# Altium PCB Backplane.PcbDoc (part 1 of 3)
Units mil, origin at the board's own origin, x right, y up, seen from the top; angles counter-clockwise.
Board outline 16600 x 5110.24 mil, 4 copper layers (Component Side, Signal Layer 2, Signal Layer 1, Solder Side), stack 33.234 mil thick; 44 components, 199 nets, 1072 pads, 16 vias.
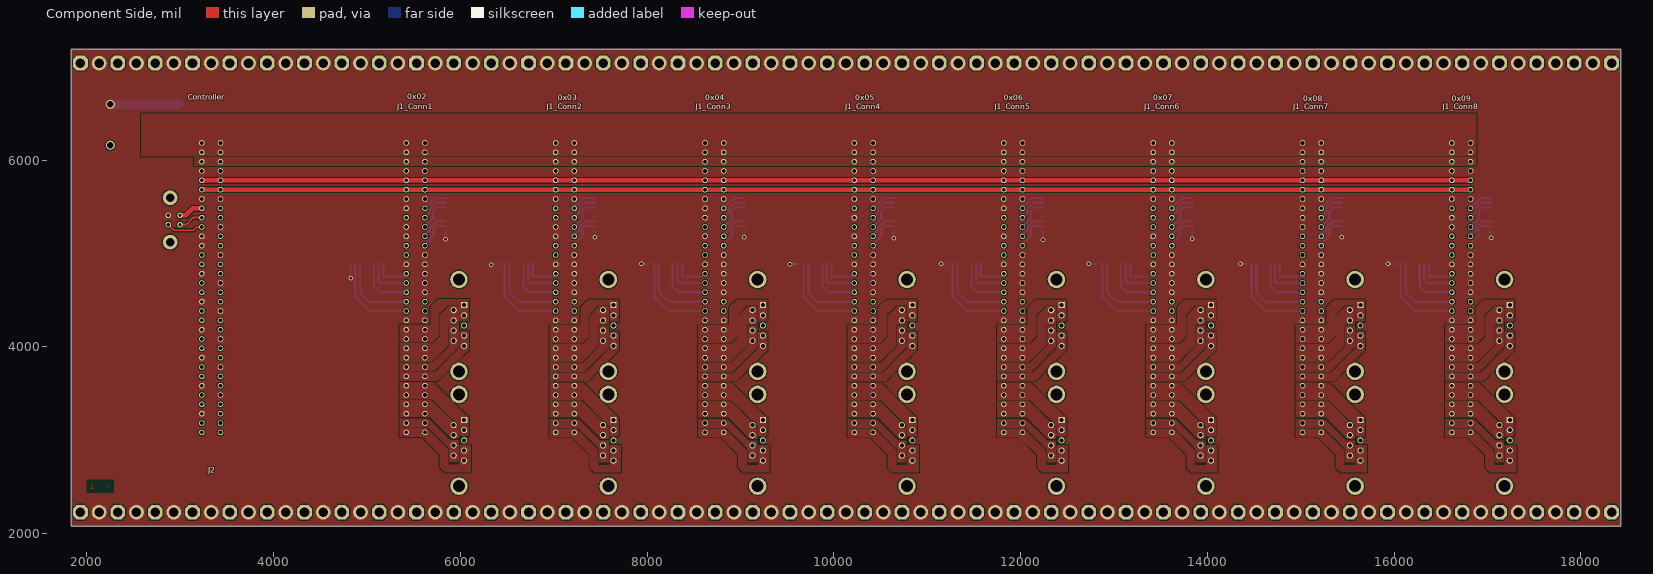
[diagram p0: Component Side view]
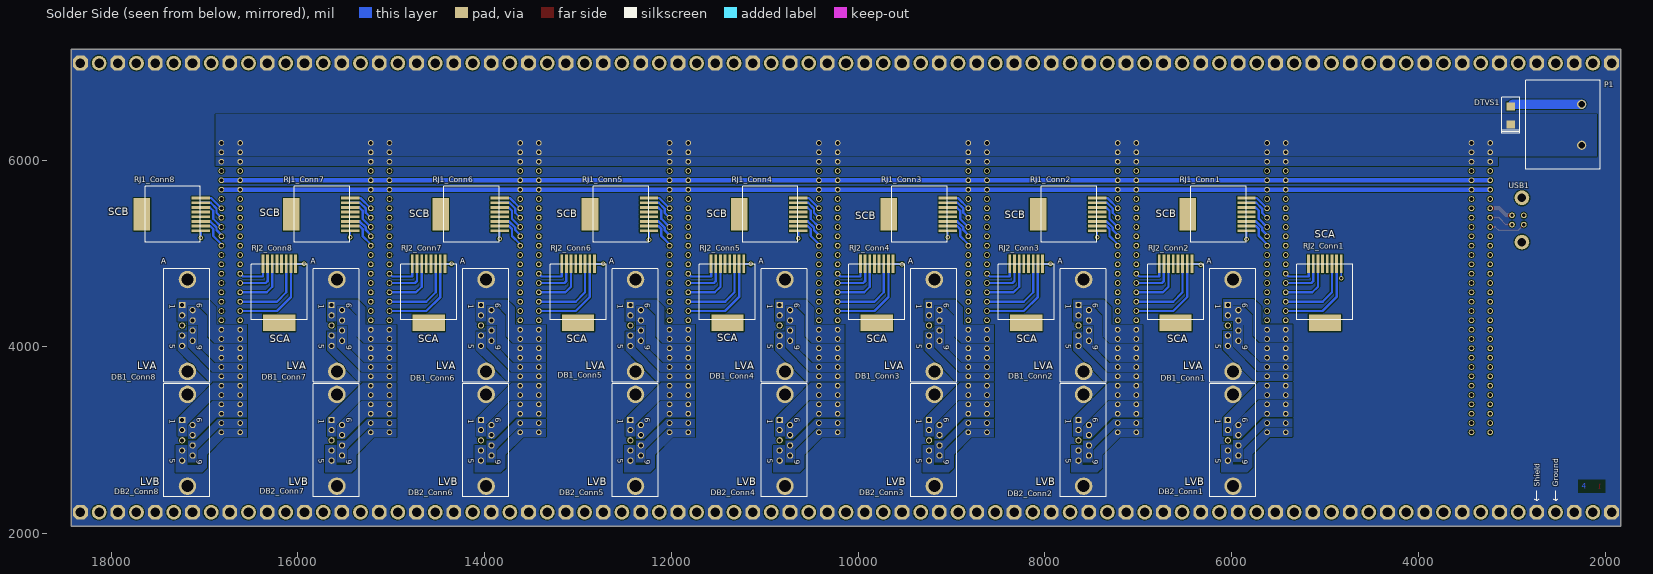
[diagram p1: Solder Side view, seen from below]
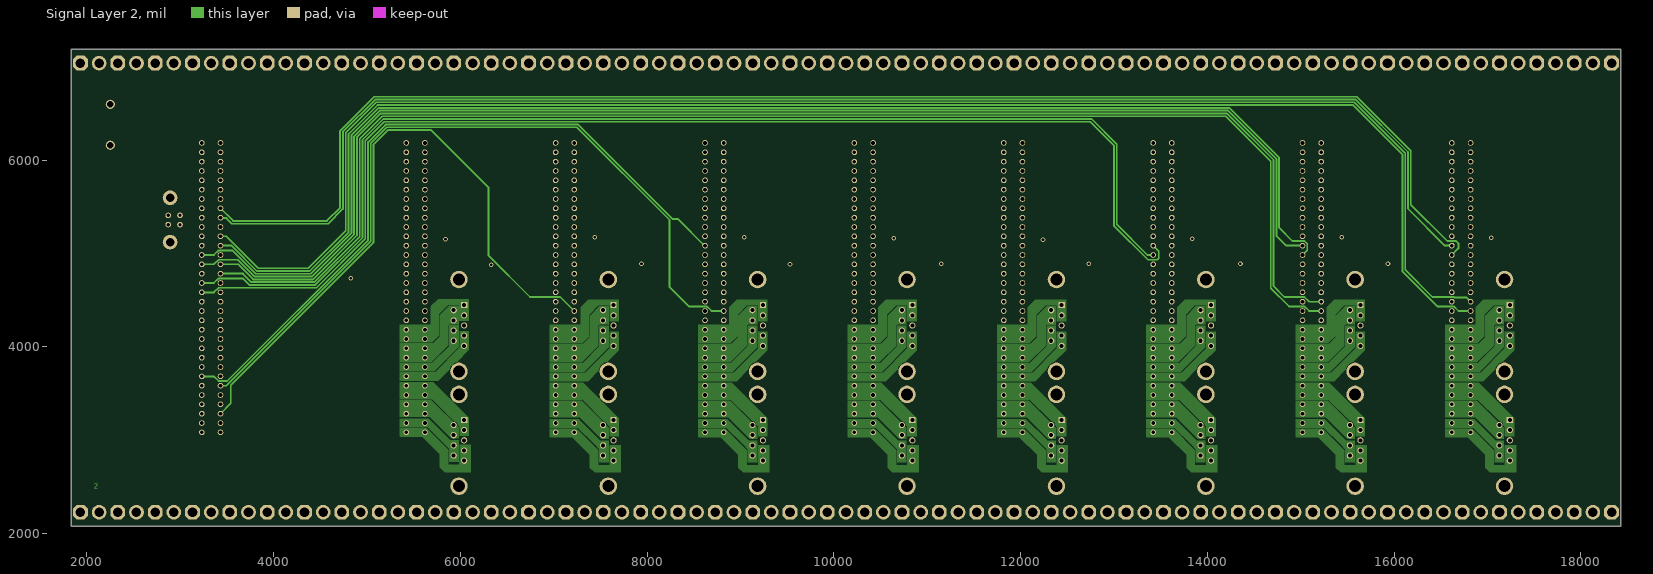
[diagram p2: Signal Layer 2]
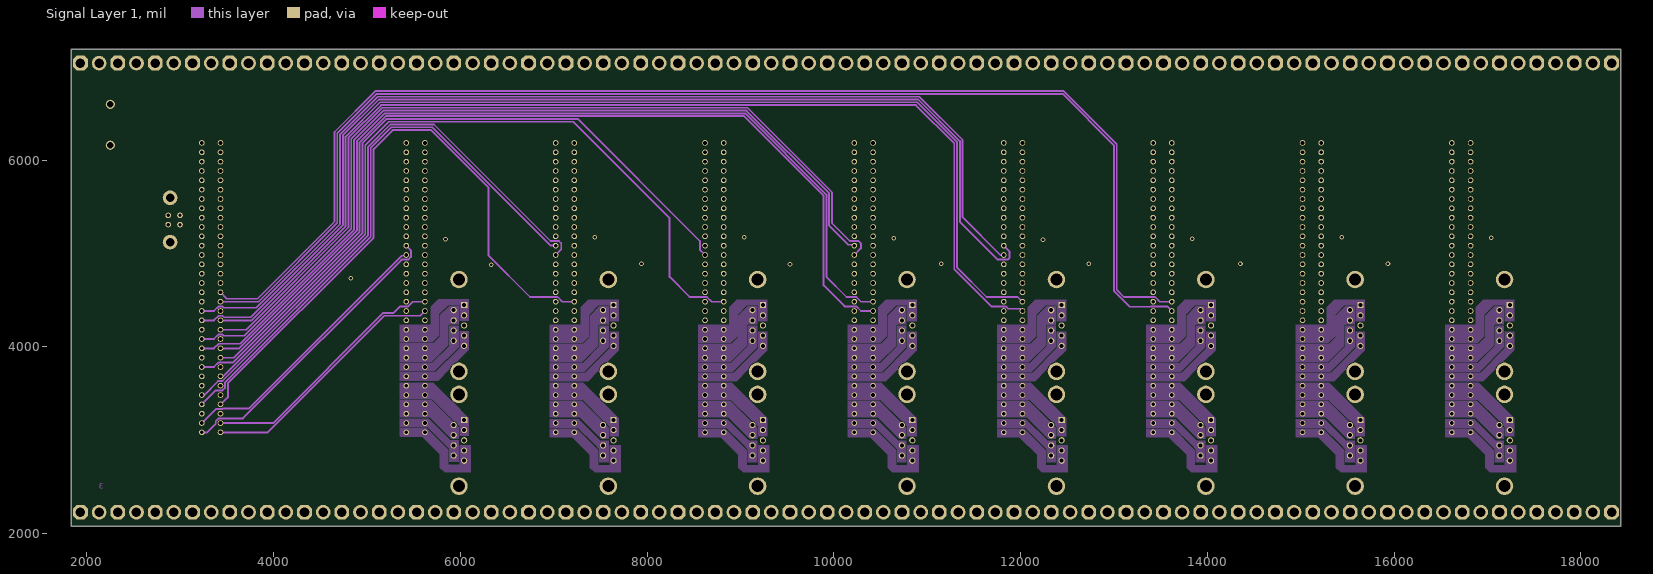
[diagram p3: Signal Layer 1]
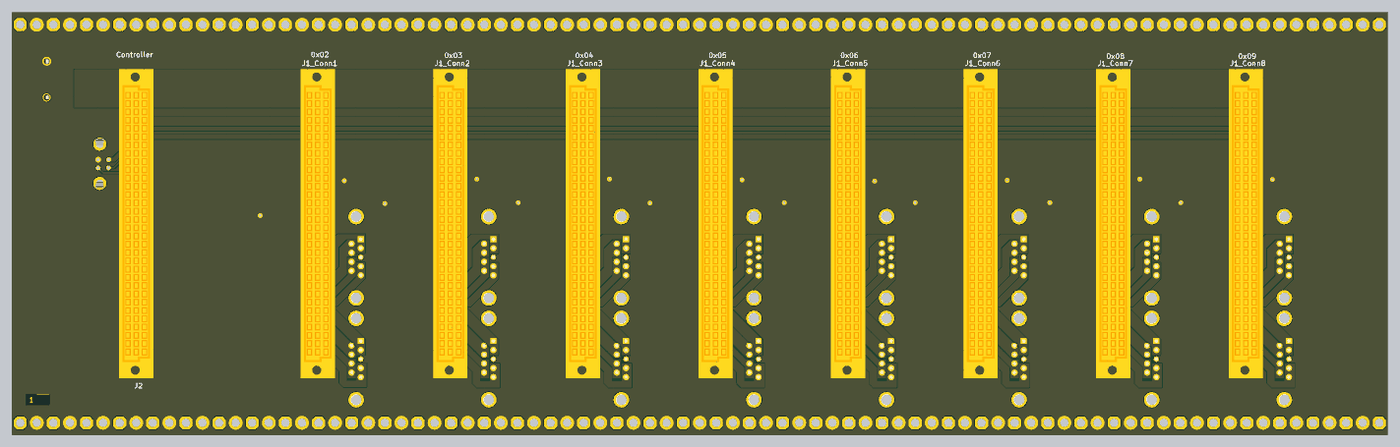
[diagram p6: 3D render of the assembled board from above, using the file's embedded part models]
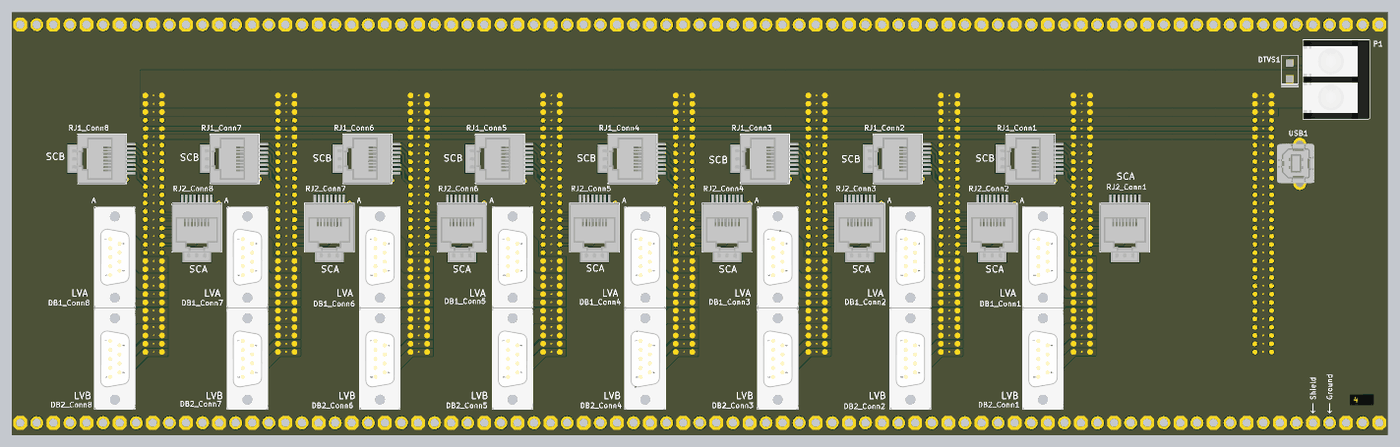
[diagram p7: 3D render of the assembled board from below, using the file's embedded part models]

## Layer stack, top to bottom
Top Solder: solder mask 0.4, Solder Resist, Dk 3.5
Component Side: signal copper 1.4
Dielectric 1: core 12.6, FR-4, Dk 4.8
Signal Layer 2: signal copper 1.4173
Dielectric 3: prepreg 5, Dk 4.2
Signal Layer 1: signal copper 1.4169
Dielectric 4: core 10, Dk 4.2
Solder Side: signal copper 1.4
Bottom Solder: solder mask 0.4, Solder Resist, Dk 3.5

## Board outline
1830,2080 18430,2080 18430,7190.23 1830,7190.24

## Design rules (kind name [scope] priority, off if disabled: settings)
Clearance [All] p1: gap=10.08 ignorepadtopadclearanceinfootprint=FALSE except(0: Arc-Hole Track-Hole SMDPad-Hole THPad-Hole Via-Hole Fill-Hole Poly-Hole Region-Hole Text-Hole)
PolygonConnect [All] p1: connectstyle=Direct reliefconductorwidth=39.37 reliefentries=4 polygonreliefangle="90 Angle" airgapwidth=10.08
RoutingVias [All] p1: holewidth=31.5 width=62.99 viastyle="Through Hole" minholewidth=28 minwidth=50 maxholewidth=28 maxwidth=50
SolderMaskExpansion [All] p1: expansion=4
Width Width_2 [(InNet('NetDB1_1') OR InNet('NetDB1_4') OR InNet('NetDB1_6') OR InNet('NetDB1_8'))] p1: maxlimit=59.06 minlimit=10 preferedwidth=59.06 toplayer_minwidth=59.06 midlayer1_maxwidth=10 midlayer1_prefwidth=10 midlayer2_maxwidth=10 midlayer2_prefwidth=10 bottomlayer_minwidth=59.06 minimp=50.000000 maximp=50.000000 favimp=50.000000
Width [(InNet('+5V') OR InNet('24V'))] p2: maxlimit=98.43 minlimit=11.81 preferedwidth=98.43 midlayer1_maxwidth=11.81 midlayer1_prefwidth=11.81 midlayer2_maxwidth=11.81 midlayer2_prefwidth=11.81 minimp=50.000000 maximp=50.000000 favimp=50.000000
Width Width_1 [All] p3: maxlimit=98.43 minlimit=10 preferedwidth=19 toplayer_prefwidth=10 midlayer1_maxwidth=78.74 midlayer2_maxwidth=78.74 bottomlayer_prefwidth=10 minimp=50.000000 maximp=50.000000 favimp=50.000000
30 further rules are at their usual default settings.

## Classes and differential pairs
component class Conn8: DB1_Conn8 DB2_Conn8 J1_Conn8 RJ1_Conn8 RJ2_Conn8
component class Conn7: DB1_Conn7 DB2_Conn7 J1_Conn7 RJ1_Conn7 RJ2_Conn7
component class Conn6: DB1_Conn6 DB2_Conn6 J1_Conn6 RJ1_Conn6 RJ2_Conn6
component class Conn5: DB1_Conn5 DB2_Conn5 J1_Conn5 RJ1_Conn5 RJ2_Conn5
component class Conn4: DB1_Conn4 DB2_Conn4 J1_Conn4 RJ1_Conn4 RJ2_Conn4
component class Conn3: DB1_Conn3 DB2_Conn3 J1_Conn3 RJ1_Conn3 RJ2_Conn3
component class Conn2: DB1_Conn2 DB2_Conn2 J1_Conn2 RJ1_Conn2 RJ2_Conn2
component class Conn1: DB1_Conn1 DB2_Conn1 J1_Conn1 RJ1_Conn1 RJ2_Conn1
component class Backplane: DTVS1 J1 J2 P1 P3 USB1
channel class Connectors: U_Connectors1 U_Connectors2

## Components (designator, comment, footprint, x,y, rotation, side; value= is the part's Value field where it differs from the comment)
DB1_Conn1 "D Connector 9" DSUB1.STRAIGHT 5610,4230 r270 bottom (schematic designator DB1)
DB1_Conn2 "D Connector 9" DSUB1.STRAIGHT 7210,4230 r270 bottom (schematic designator DB1)
DB1_Conn3 "D Connector 9" DSUB1.STRAIGHT 8810,4230 r270 bottom (schematic designator DB1)
DB1_Conn4 "D Connector 9" DSUB1.STRAIGHT 10410,4230 r270 bottom (schematic designator DB1)
DB1_Conn5 "D Connector 9" DSUB1.STRAIGHT 12010,4230 r270 bottom (schematic designator DB1)
DB1_Conn6 "D Connector 9" DSUB1.STRAIGHT 13610,4230 r270 bottom (schematic designator DB1)
DB1_Conn7 "D Connector 9" DSUB1.STRAIGHT 15210,4230 r270 bottom (schematic designator DB1)
DB1_Conn8 "D Connector 9" DSUB1.STRAIGHT 16810,4230 r270 bottom (schematic designator DB1)
DB2_Conn1 "D Connector 9" DSUB1.STRAIGHT 5610,3000 r270 bottom (schematic designator DB2)
DB2_Conn2 "D Connector 9" DSUB1.STRAIGHT 7210,3000 r270 bottom (schematic designator DB2)
DB2_Conn3 "D Connector 9" DSUB1.STRAIGHT 8810,3000 r270 bottom (schematic designator DB2)
DB2_Conn4 "D Connector 9" DSUB1.STRAIGHT 10410,3000 r270 bottom (schematic designator DB2)
DB2_Conn5 "D Connector 9" DSUB1.STRAIGHT 12010,3000 r270 bottom (schematic designator DB2)
DB2_Conn6 "D Connector 9" DSUB1.STRAIGHT 13610,3000 r270 bottom (schematic designator DB2)
DB2_Conn7 "D Connector 9" DSUB1.STRAIGHT 15210,3000 r270 bottom (schematic designator DB2)
DB2_Conn8 "D Connector 9" DSUB1.STRAIGHT 16810,3000 r270 bottom (schematic designator DB2)
DTVS1 "SMBJ36A" SMBJ 3010,6480 r90 bottom
J1_Conn1 "DIN41612_64WAY" "09 03 164 6919" 5520,4785 r270 top (schematic designator J1)
J1_Conn2 "DIN41612_64WAY" "09 03 164 6919" 7120,4785 r270 top (schematic designator J1)
J1_Conn3 "DIN41612_64WAY" "09 03 164 6919" 8720,4785 r270 top (schematic designator J1)
J1_Conn4 "DIN41612_64WAY" "09 03 164 6919" 10320,4785 r270 top (schematic designator J1)
J1_Conn5 "DIN41612_64WAY" "09 03 164 6919" 11920,4785 r270 top (schematic designator J1)
J1_Conn6 "DIN41612_64WAY" "09 03 164 6919" 13520,4785 r270 top (schematic designator J1)
J1_Conn7 "DIN41612_64WAY" "09 03 164 6919" 15120,4785 r270 top (schematic designator J1)
J1_Conn8 "DIN41612_64WAY" "09 03 164 6919" 16720,4785 r270 top (schematic designator J1)
J2 "DIN41612_64WAY" "09 03 164 6919" 3330,4785 r270 top
P1 "Header 2" 8PCV 2250,6380 r270 bottom
RJ1_Conn1 "85513-5013" RJ45_SMD_VERT 5840,5420 r90 bottom (schematic designator RJ1)
RJ1_Conn2 "85513-5013" RJ45_SMD_VERT 7440,5420 r90 bottom (schematic designator RJ1)
RJ1_Conn3 "85513-5013" RJ45_SMD_VERT 9040,5420 r90 bottom (schematic designator RJ1)
RJ1_Conn4 "85513-5013" RJ45_SMD_VERT 10640,5420 r90 bottom (schematic designator RJ1)
RJ1_Conn5 "85513-5013" RJ45_SMD_VERT 12240,5420 r90 bottom (schematic designator RJ1)
RJ1_Conn6 "85513-5013" RJ45_SMD_VERT 13840,5420 r90 bottom (schematic designator RJ1)
RJ1_Conn7 "85513-5013" RJ45_SMD_VERT 15440,5420 r90 bottom (schematic designator RJ1)
RJ1_Conn8 "85513-5013" RJ45_SMD_VERT 17040,5420 r90 bottom (schematic designator RJ1)
RJ2_Conn1 "85513-5013" RJ45_SMD_VERT 5000,4890 r0 bottom (schematic designator RJ2)
RJ2_Conn2 "85513-5013" RJ45_SMD_VERT 6600,4890 r0 bottom (schematic designator RJ2)
RJ2_Conn3 "85513-5013" RJ45_SMD_VERT 8200,4890 r0 bottom (schematic designator RJ2)
RJ2_Conn4 "85513-5013" RJ45_SMD_VERT 9800,4890 r0 bottom (schematic designator RJ2)
RJ2_Conn5 "85513-5013" RJ45_SMD_VERT 11400,4890 r0 bottom (schematic designator RJ2)
RJ2_Conn6 "85513-5013" RJ45_SMD_VERT 13000,4890 r0 bottom (schematic designator RJ2)
RJ2_Conn7 "85513-5013" RJ45_SMD_VERT 14600,4890 r0 bottom (schematic designator RJ2)
RJ2_Conn8 "85513-5013" RJ45_SMD_VERT 16200,4890 r0 bottom (schematic designator RJ2)
USB1 "USB_B" USB_B_VERTICAL 2870,5360 r90 bottom

## Footprints (in the part's own frame and the unit in brackets; to place one, negate y for a bottom-side part, rotate by r counter-clockwise, add the part's x,y. Pads: shape width x height; smd on the part's side, far side on the other; paste and mask are expansions set on the pad)
8PCV [mil]
  round 98.43 hole 73: 1(-219,0) 2(219,0)
  silkscreen extent -479,-600 479,200, body extent -472,-601 476,199, height 770
"09 03 164 6919" [mil]
  round 60 hole 39.37: 0(-1400,100) 1(-1300,100) 2(-1200,100) 3(-1100,100) 4(-1000,100) 5(-900,100) 6(-800,100) 7(-700,100) 8(-600,100) 9(-500,100) 10(-400,100) 11(-300,100) 12(-200,100) 13(-100,100) 14(0,100) 15(100,100) 16(200,100) 17(300,100) 18(400,100) 19(500,100) 20(600,100) 21(700,100) 22(800,100) 23(900,100) 24(1000,100) 25(1100,100) 26(1200,100) 27(1300,100) 28(1400,100) 29(1500,100) 30(1600,100) 31(1700,100) 32(-1400,-100) 33(-1300,-100) 34(-1200,-100) 35(-1100,-100) 36(-1000,-100) 37(-900,-100) 38(-800,-100) 39(-700,-100) 40(-600,-100) 41(-500,-100) 42(-400,-100) 43(-300,-100) 44(-200,-100) 45(-100,-100) 46(0,-100) 47(100,-100) 48(200,-100) 49(300,-100) 50(400,-100) 51(500,-100) 52(600,-100) 53(700,-100) 54(800,-100) 55(900,-100) 56(1000,-100) 57(1100,-100) 58(1200,-100) 59(1300,-100) 60(1400,-100) 61(1500,-100) 62(1600,-100) 63(1700,-100)
  body extent -1720,-207 2017,207, height 477
DSUB1.STRAIGHT [mm]
  round 4.76 hole 3.26: 0(-12.495,-9.5) 0(12.495,-9.5)
  rect 1.69x1.69 hole 1.09: 1(-5.54,-10.92)
  round 1.69 hole 1.09: 2(-2.77,-10.92) 3(0,-10.92) 4(2.77,-10.92) 5(5.54,-10.92) 6(-4.155,-8.08) 7(-1.385,-8.08) 8(1.385,-8.08) 9(4.155,-8.08)
  silkscreen extent -15.44,-15.9 15.42,-3.38, body extent -15.44,-15.9 15.37,-3.3, height 12.7
RJ45_SMD_VERT [mm]
  rect 8.8x4.5 smd: 0(0,16.05)
  rect 0.76x5 smd: 1(4.445,0) 2(3.175,0) 3(1.905,0) 4(0.635,0) 5(-0.635,0) 6(-1.905,0) 7(-3.175,0) 8(-4.445,0)
  silkscreen extent -7.62,0.12 7.62,15.2, body extent -7.62,-1.74 7.62,17.74, height 12.85
SMBJ [mm]
  rect 2.16x2.26 smd: 1(-2.45,0) 2(2.45,0)
  silkscreen extent -4.9,-2.5 4.9,2.5, body extent -3.2,-2 3.3,2, height 2
USB_B_VERTICAL [mm]
  round 4 hole 2.3: 0(-6.02,0.505) 0(6.02,0.505)
  round 1.524 hole 0.92: 1(1.25,3.21) 2(-1.25,3.21) 3(-1.25,0) 4(1.25,0)
  body extent -7.47,-4.06 7.67,7.4, height 15.94

## Part data
DB1_Conn1 DB1_Conn2 DB1_Conn3 DB1_Conn4 DB1_Conn5 DB1_Conn6 DB1_Conn7 DB1_Conn8 DB2_Conn1 DB2_Conn2 DB2_Conn3 DB2_Conn4 DB2_Conn5 DB2_Conn6 DB2_Conn7 DB2_Conn8: "Receptacle Assembly, 9 Position, Right Angle", PackageDocument=O, PartNo=L177TSEH09SOL2RM8, DatasheetDocument=1-Sep-1999, Gender=Receptacle, LatestRevisionDate=17-Jul-2002, LatestRevisionNote="Re-released for DXP Platform.", Orientation="Right Angle", PackageReference=788750, Positions=9, Published=15-Jun-2001, Publisher="Altium Limited"
DTVS1: library part SMBJ, "TVS", ComponentLink1Description="Manufacturer Link", ComponentLink1URL=http://www.infineon.com/, ComponentLink2Description=Datasheet, ComponentLink2URL=http://www.infineon.com/upload/Document/cmc_upload/documents/080/656/bas116series.pdf, DatasheetVersion=Oct-1999, LatestRevisionDate=29-May-2009, LatestRevisionNote="IPC-7351 Footprint Added.", Note="Pin 2 is not connected and not drawn.", PackageDescription="3-Pin SOT-23 Package 0.95 mm Pitch, 2.5 mm Lead Span", PackageReference=SOT-23, PackageVersion=Sep-2001, PartNo=SMBJ36A, Published=21-Mar-2003, Publisher="Altium Limited"
P1: "Header, 2-Pin", PartNo=8PCV-02-006, LatestRevisionDate=17-Jul-2002, LatestRevisionNote="Re-released for DXP Platform.", Publisher="Altium Limited"
RJ1_Conn1 RJ1_Conn2 RJ1_Conn3 RJ1_Conn4 RJ1_Conn5 RJ1_Conn6 RJ1_Conn7 RJ1_Conn8 RJ2_Conn1 RJ2_Conn2 RJ2_Conn3 RJ2_Conn4 RJ2_Conn5 RJ2_Conn6 RJ2_Conn7 RJ2_Conn8: PACKAGE="RJ45, JACK, 8P8C", MPN=85513-5013, PartNo=85513-5013, SUPPLIER=MOLEX

## Free pads (board coordinates)
  oct 157.48x157.48 hole 102.36: 0(1930,2229) 0(1930,7041) 0(2330,2229) 0(2330,7041) 0(2730,2229) 0(2730,7041) 0(3130,2229) 0(3130,7041) 0(3530,2229) 0(3530,7041) 0(3930,2229) 0(3930,7041) 0(4330,2229) 0(4330,7041) 0(4730,2229) 0(4730,7041) 0(5130,2229) 0(5130,7041) 0(5530,2229) 0(5530,7041) 0(5930,2229) 0(5930,7041) 0(6330,2229) 0(6330,7041) 0(6730,2229) 0(6730,7041) 0(7130,2229) 0(7130,7041) 0(7530,2229) 0(7530,7041) 0(7930,2229) 0(7930,7041) 0(8330,2229) 0(8330,7041) 0(8730,2229) 0(8730,7041) 0(9130,2229) 0(9130,7041) 0(9530,2229) 0(9530,7041) 0(9930,2229) 0(9930,7041) 0(10330,2229) 0(10330,7041) 0(10730,2229) 0(10730,7041) 0(11130,2229) 0(11130,7041) 0(11530,2229) 0(11530,7041) 0(11930,2229) 0(11930,7041) 0(12330,2229) 0(12330,7041) 0(12730,2229) 0(12730,7041) 0(13130,2229) 0(13130,7041) 0(13530,2229) 0(13530,7041) 0(13930,2229) 0(13930,7041) 0(14330,2229) 0(14330,7041) 0(14730,2229) 0(14730,7041) 0(15130,2229) 0(15130,7041) 0(15530,2229) 0(15530,7041) 0(15930,2229) 0(15930,7041) 0(16330,2229) 0(16330,7041) 0(16730,2229) 0(16730,7041) 0(17130,2229) 0(17130,7041) 0(17530,2229) 0(17530,7041) 0(17930,2229) 0(17930,7041) 0(18330,2229) 0(18330,7041)
  round 157.48 hole 102.36: 0(2130,2230) 0(2130,7040) 0(2530,2230) 0(2530,7040) 0(2930,2230) 0(2930,7040) 0(3330,2230) 0(3330,7040) 0(3730,2230) 0(3730,7040) 0(4130,2230) 0(4130,7040) 0(4530,2230) 0(4530,7040) 0(4930,2230) 0(4930,7040) 0(5330,2230) 0(5330,7040) 0(5730,2230) 0(5730,7040) 0(6130,2230) 0(6130,7040) 0(6530,2230) 0(6530,7040) 0(6930,2230) 0(6930,7040) 0(7330,2230) 0(7330,7040) 0(7730,2230) 0(7730,7040) 0(8130,2230) 0(8130,7040) 0(8530,2230) 0(8530,7040) 0(8930,2230) 0(8930,7040) 0(9330,2230) 0(9330,7040) 0(9730,2230) 0(9730,7040) 0(10130,2230) 0(10130,7040) 0(10530,2230) 0(10530,7040) 0(10930,2230) 0(10930,7040) 0(11330,2230) 0(11330,7040) 0(11730,2230) 0(11730,7040) 0(12130,2230) 0(12130,7040) 0(12530,2230) 0(12530,7040) 0(12930,2230) 0(12930,7040) 0(13330,2230) 0(13330,7040) 0(13730,2230) 0(13730,7040) 0(14130,2230) 0(14130,7040) 0(14530,2230) 0(14530,7040) 0(14930,2230) 0(14930,7040) 0(15330,2230) 0(15330,7040) 0(15730,2230) 0(15730,7040) 0(16130,2230) 0(16130,7040) 0(16530,2230) 0(16530,7040) 0(16930,2230) 0(16930,7040) 0(17330,2230) 0(17330,7040) 0(17730,2230) 0(17730,7040) 0(18130,2230) 0(18130,7040)

## Via types
v1: diameter 50, hole 28, Component Side to Solder Side, 16 vias

## Nets (pads, with @x,y where several pads share a name; then routed paths per layer and width w, separated by ;. In a path a pad name is that pad's centre, name@x,y a point inside that pad or via, vN(x,y) a via of type N, cw(c..) or ccw(c..) an arc to the next point about the centre after c; other vN are vias at no path point)
36V: DTVS1.1 J1_Conn1.0 J1_Conn1.1 J1_Conn1.32 J1_Conn1.33 J1_Conn2.0 J1_Conn2.1 J1_Conn2.32 J1_Conn2.33 J1_Conn3.0 J1_Conn3.1 J1_Conn3.32 J1_Conn3.33 J1_Conn4.0 J1_Conn4.1 J1_Conn4.32 J1_Conn4.33 J1_Conn5.0 J1_Conn5.1 J1_Conn5.32 J1_Conn5.33 J1_Conn6.0 J1_Conn6.1 J1_Conn6.32 J1_Conn6.33 J1_Conn7.0 J1_Conn7.1 J1_Conn7.32 J1_Conn7.33 J1_Conn8.0 J1_Conn8.1 J1_Conn8.32 J1_Conn8.33 J2.0 J2.1 J2.32 J2.33 P1.2
+5VA_Conn1: DB2_Conn1.1 DB2_Conn1.2 J1_Conn1.26 J1_Conn1.27 J1_Conn1.58 J1_Conn1.59
+5VA_Conn2: DB2_Conn2.1 DB2_Conn2.2 J1_Conn2.26 J1_Conn2.27 J1_Conn2.58 J1_Conn2.59
+5VA_Conn3: DB2_Conn3.1 DB2_Conn3.2 J1_Conn3.26 J1_Conn3.27 J1_Conn3.58 J1_Conn3.59
+5VA_Conn4: DB2_Conn4.1 DB2_Conn4.2 J1_Conn4.26 J1_Conn4.27 J1_Conn4.58 J1_Conn4.59
+5VA_Conn5: DB2_Conn5.1 DB2_Conn5.2 J1_Conn5.26 J1_Conn5.27 J1_Conn5.58 J1_Conn5.59
+5VA_Conn6: DB2_Conn6.1 DB2_Conn6.2 J1_Conn6.26 J1_Conn6.27 J1_Conn6.58 J1_Conn6.59
+5VA_Conn7: DB2_Conn7.1 DB2_Conn7.2 J1_Conn7.26 J1_Conn7.27 J1_Conn7.58 J1_Conn7.59
+5VA_Conn8: DB2_Conn8.1 DB2_Conn8.2 J1_Conn8.26 J1_Conn8.27 J1_Conn8.58 J1_Conn8.59
+5VB_Conn1: DB1_Conn1.1 DB1_Conn1.2 J1_Conn1.20 J1_Conn1.21 J1_Conn1.52 J1_Conn1.53
+5VB_Conn2: DB1_Conn2.1 DB1_Conn2.2 J1_Conn2.20 J1_Conn2.21 J1_Conn2.52 J1_Conn2.53
+5VB_Conn3: DB1_Conn3.1 DB1_Conn3.2 J1_Conn3.20 J1_Conn3.21 J1_Conn3.52 J1_Conn3.53
+5VB_Conn4: DB1_Conn4.1 DB1_Conn4.2 J1_Conn4.20 J1_Conn4.21 J1_Conn4.52 J1_Conn4.53
+5VB_Conn5: DB1_Conn5.1 DB1_Conn5.2 J1_Conn5.20 J1_Conn5.21 J1_Conn5.52 J1_Conn5.53
+5VB_Conn6: DB1_Conn6.1 DB1_Conn6.2 J1_Conn6.20 J1_Conn6.21 J1_Conn6.52 J1_Conn6.53
+5VB_Conn7: DB1_Conn7.1 DB1_Conn7.2 J1_Conn7.20 J1_Conn7.21 J1_Conn7.52 J1_Conn7.53
+5VB_Conn8: DB1_Conn8.1 DB1_Conn8.2 J1_Conn8.20 J1_Conn8.21 J1_Conn8.52 J1_Conn8.53
+5VGNDA_Conn1: DB2_Conn1.6 DB2_Conn1.7 J1_Conn1.28 J1_Conn1.29 J1_Conn1.60 J1_Conn1.61
+5VGNDA_Conn2: DB2_Conn2.6 DB2_Conn2.7 J1_Conn2.28 J1_Conn2.29 J1_Conn2.60 J1_Conn2.61
+5VGNDA_Conn3: DB2_Conn3.6 DB2_Conn3.7 J1_Conn3.28 J1_Conn3.29 J1_Conn3.60 J1_Conn3.61
+5VGNDA_Conn4: DB2_Conn4.6 DB2_Conn4.7 J1_Conn4.28 J1_Conn4.29 J1_Conn4.60 J1_Conn4.61
+5VGNDA_Conn5: DB2_Conn5.6 DB2_Conn5.7 J1_Conn5.28 J1_Conn5.29 J1_Conn5.60 J1_Conn5.61
+5VGNDA_Conn6: DB2_Conn6.6 DB2_Conn6.7 J1_Conn6.28 J1_Conn6.29 J1_Conn6.60 J1_Conn6.61
+5VGNDA_Conn7: DB2_Conn7.6 DB2_Conn7.7 J1_Conn7.28 J1_Conn7.29 J1_Conn7.60 J1_Conn7.61
+5VGNDA_Conn8: DB2_Conn8.6 DB2_Conn8.7 J1_Conn8.28 J1_Conn8.29 J1_Conn8.60 J1_Conn8.61
+5VGNDB_Conn1: DB1_Conn1.6 DB1_Conn1.7 J1_Conn1.22 J1_Conn1.23 J1_Conn1.54 J1_Conn1.55
+5VGNDB_Conn2: DB1_Conn2.6 DB1_Conn2.7 J1_Conn2.22 J1_Conn2.23 J1_Conn2.54 J1_Conn2.55
+5VGNDB_Conn3: DB1_Conn3.6 DB1_Conn3.7 J1_Conn3.22 J1_Conn3.23 J1_Conn3.54 J1_Conn3.55
+5VGNDB_Conn4: DB1_Conn4.6 DB1_Conn4.7 J1_Conn4.22 J1_Conn4.23 J1_Conn4.54 J1_Conn4.55
+5VGNDB_Conn5: DB1_Conn5.6 DB1_Conn5.7 J1_Conn5.22 J1_Conn5.23 J1_Conn5.54 J1_Conn5.55
+5VGNDB_Conn6: DB1_Conn6.6 DB1_Conn6.7 J1_Conn6.22 J1_Conn6.23 J1_Conn6.54 J1_Conn6.55
+5VGNDB_Conn7: DB1_Conn7.6 DB1_Conn7.7 J1_Conn7.22 J1_Conn7.23 J1_Conn7.54 J1_Conn7.55
+5VGNDB_Conn8: DB1_Conn8.6 DB1_Conn8.7 J1_Conn8.22 J1_Conn8.23 J1_Conn8.54 J1_Conn8.55
+9V: J1_Conn1.2 J1_Conn1.34 J1_Conn2.2 J1_Conn2.34 J1_Conn3.2 J1_Conn3.34 J1_Conn4.2 J1_Conn4.34 J1_Conn5.2 J1_Conn5.34 J1_Conn6.2 J1_Conn6.34 J1_Conn7.2 J1_Conn7.34 J1_Conn8.2 J1_Conn8.34 J2.2 J2.34
-5VA_Conn1: DB2_Conn1.4 DB2_Conn1.5 J1_Conn1.31 J1_Conn1.63
-5VA_Conn2: DB2_Conn2.4 DB2_Conn2.5 J1_Conn2.31 J1_Conn2.63
-5VA_Conn3: DB2_Conn3.4 DB2_Conn3.5 J1_Conn3.31 J1_Conn3.63
-5VA_Conn4: DB2_Conn4.4 DB2_Conn4.5 J1_Conn4.31 J1_Conn4.63
-5VA_Conn5: DB2_Conn5.4 DB2_Conn5.5 J1_Conn5.31 J1_Conn5.63
-5VA_Conn6: DB2_Conn6.4 DB2_Conn6.5 J1_Conn6.31 J1_Conn6.63
-5VA_Conn7: DB2_Conn7.4 DB2_Conn7.5 J1_Conn7.31 J1_Conn7.63
-5VA_Conn8: DB2_Conn8.4 DB2_Conn8.5 J1_Conn8.31 J1_Conn8.63
-5VB_Conn1: DB1_Conn1.4 DB1_Conn1.5 J1_Conn1.25 J1_Conn1.57
-5VB_Conn2: DB1_Conn2.4 DB1_Conn2.5 J1_Conn2.25 J1_Conn2.57
-5VB_Conn3: DB1_Conn3.4 DB1_Conn3.5 J1_Conn3.25 J1_Conn3.57
-5VB_Conn4: DB1_Conn4.4 DB1_Conn4.5 J1_Conn4.25 J1_Conn4.57
-5VB_Conn5: DB1_Conn5.4 DB1_Conn5.5 J1_Conn5.25 J1_Conn5.57
-5VB_Conn6: DB1_Conn6.4 DB1_Conn6.5 J1_Conn6.25 J1_Conn6.57
-5VB_Conn7: DB1_Conn7.4 DB1_Conn7.5 J1_Conn7.25 J1_Conn7.57
-5VB_Conn8: DB1_Conn8.4 DB1_Conn8.5 J1_Conn8.25 J1_Conn8.57
-5VGNDA_Conn1: DB2_Conn1.8 DB2_Conn1.9 J1_Conn1.30 J1_Conn1.62
-5VGNDA_Conn2: DB2_Conn2.8 DB2_Conn2.9 J1_Conn2.30 J1_Conn2.62
-5VGNDA_Conn3: DB2_Conn3.8 DB2_Conn3.9 J1_Conn3.30 J1_Conn3.62
-5VGNDA_Conn4: DB2_Conn4.8 DB2_Conn4.9 J1_Conn4.30 J1_Conn4.62
-5VGNDA_Conn5: DB2_Conn5.8 DB2_Conn5.9 J1_Conn5.30 J1_Conn5.62
-5VGNDA_Conn6: DB2_Conn6.8 DB2_Conn6.9 J1_Conn6.30 J1_Conn6.62
-5VGNDA_Conn7: DB2_Conn7.8 DB2_Conn7.9 J1_Conn7.30 J1_Conn7.62
-5VGNDA_Conn8: DB2_Conn8.8 DB2_Conn8.9 J1_Conn8.30 J1_Conn8.62
-5VGNDB_Conn1: DB1_Conn1.8 DB1_Conn1.9 J1_Conn1.24 J1_Conn1.56
-5VGNDB_Conn2: DB1_Conn2.8 DB1_Conn2.9 J1_Conn2.24 J1_Conn2.56
-5VGNDB_Conn3: DB1_Conn3.8 DB1_Conn3.9 J1_Conn3.24 J1_Conn3.56
-5VGNDB_Conn4: DB1_Conn4.8 DB1_Conn4.9 J1_Conn4.24 J1_Conn4.56
-5VGNDB_Conn5: DB1_Conn5.8 DB1_Conn5.9 J1_Conn5.24 J1_Conn5.56
-5VGNDB_Conn6: DB1_Conn6.8 DB1_Conn6.9 J1_Conn6.24 J1_Conn6.56
-5VGNDB_Conn7: DB1_Conn7.8 DB1_Conn7.9 J1_Conn7.24 J1_Conn7.56
-5VGNDB_Conn8: DB1_Conn8.8 DB1_Conn8.9 J1_Conn8.24 J1_Conn8.56
GND: DTVS1.2 J1_Conn1.3 J1_Conn1.6 J1_Conn1.12 J1_Conn1.13 J1_Conn1.14 J1_Conn1.15 J1_Conn1.16 J1_Conn1.19 J1_Conn1.35 J1_Conn1.38 J1_Conn1.39 J1_Conn1.41 J1_Conn1.42 J1_Conn1.45 J1_Conn1.51 J1_Conn2.3 J1_Conn2.6 J1_Conn2.12 J1_Conn2.13 J1_Conn2.14 J1_Conn2.15 J1_Conn2.16 J1_Conn2.19 J1_Conn2.35 J1_Conn2.38 J1_Conn2.41 J1_Conn2.42 J1_Conn2.45 J1_Conn2.51 J1_Conn3.3 J1_Conn3.6 J1_Conn3.12 J1_Conn3.13 J1_Conn3.14 J1_Conn3.15 J1_Conn3.16 J1_Conn3.19 J1_Conn3.35 J1_Conn3.38 J1_Conn3.39 J1_Conn3.40 J1_Conn3.42 J1_Conn3.45 J1_Conn3.51 J1_Conn4.3 J1_Conn4.6 J1_Conn4.12 J1_Conn4.13 J1_Conn4.14 J1_Conn4.15 J1_Conn4.16 J1_Conn4.19 J1_Conn4.35 J1_Conn4.38 J1_Conn4.40 J1_Conn4.42 J1_Conn4.45 J1_Conn4.51 J1_Conn5.3 J1_Conn5.6 J1_Conn5.12 J1_Conn5.13 J1_Conn5.14 J1_Conn5.15 J1_Conn5.16 J1_Conn5.19 J1_Conn5.35 J1_Conn5.38 J1_Conn5.39 J1_Conn5.42 J1_Conn5.45 J1_Conn5.51 J1_Conn6.3 J1_Conn6.6 J1_Conn6.12 J1_Conn6.13 J1_Conn6.14 J1_Conn6.15 J1_Conn6.16 J1_Conn6.19 J1_Conn6.35 J1_Conn6.38 J1_Conn6.42 J1_Conn6.45 J1_Conn6.51 J1_Conn7.3 J1_Conn7.6 J1_Conn7.12 J1_Conn7.13 J1_Conn7.14 J1_Conn7.15 J1_Conn7.16 J1_Conn7.19 J1_Conn7.35 J1_Conn7.38 J1_Conn7.39 J1_Conn7.40 J1_Conn7.41 J1_Conn7.45 J1_Conn7.51 J1_Conn8.3 J1_Conn8.6 J1_Conn8.12 J1_Conn8.13 J1_Conn8.14 J1_Conn8.15 J1_Conn8.16 J1_Conn8.19 J1_Conn8.35 J1_Conn8.38 J1_Conn8.40 J1_Conn8.41 J1_Conn8.45 J1_Conn8.51 J2.3 J2.6 J2.9 J2.12 J2.15 J2.18 J2.21 J2.24 J2.27 J2.35 J2.38 J2.42 J2.43 J2.46 J2.49 J2.52 J2.55 J2.58 J2.61 P1.1 pad.0@2130,2230 pad.0@2130,7040 pad.0@2530,2230 pad.0@2530,7040 pad.0@2930,2230 pad.0@2930,7040 pad.0@3330,2230 pad.0@3330,7040 pad.0@3730,2230 pad.0@3730,7040 pad.0@4130,2230 pad.0@4130,7040 pad.0@4530,2230 pad.0@4530,7040 pad.0@4930,2230 pad.0@4930,7040 pad.0@5330,2230 pad.0@5330,7040 pad.0@5730,2230 pad.0@5730,7040 pad.0@6130,2230 pad.0@6130,7040 pad.0@6530,2230 pad.0@6530,7040 pad.0@6930,2230 pad.0@6930,7040 pad.0@7330,2230 pad.0@7330,7040 pad.0@7730,2230 pad.0@7730,7040 pad.0@8130,2230 pad.0@8130,7040 pad.0@8530,2230 pad.0@8530,7040 pad.0@8930,2230 pad.0@8930,7040 pad.0@9330,2230 pad.0@9330,7040 pad.0@9730,2230 pad.0@9730,7040 pad.0@10130,2230 pad.0@10130,7040 pad.0@10530,2230 pad.0@10530,7040 pad.0@10930,2230 pad.0@10930,7040 pad.0@11330,2230 pad.0@11330,7040 pad.0@11730,2230 pad.0@11730,7040 pad.0@12130,2230 pad.0@12130,7040 pad.0@12530,2230 pad.0@12530,7040 pad.0@12930,2230 pad.0@12930,7040 pad.0@13330,2230 pad.0@13330,7040 pad.0@13730,2230 pad.0@13730,7040 pad.0@14130,2230 pad.0@14130,7040 pad.0@14530,2230 pad.0@14530,7040 pad.0@14930,2230 pad.0@14930,7040 pad.0@15330,2230 pad.0@15330,7040 pad.0@15730,2230 pad.0@15730,7040 pad.0@16130,2230 pad.0@16130,7040 pad.0@16530,2230 pad.0@16530,7040 pad.0@16930,2230 pad.0@16930,7040 pad.0@17330,2230 pad.0@17330,7040 pad.0@17730,2230 pad.0@17730,7040 pad.0@18130,2230 pad.0@18130,7040 RJ1_Conn1.8 RJ1_Conn2.8 RJ1_Conn3.8 RJ1_Conn4.8 RJ1_Conn5.8 RJ1_Conn6.8 RJ1_Conn7.8 RJ1_Conn8.8 RJ2_Conn1.8 RJ2_Conn2.8 RJ2_Conn3.8 RJ2_Conn4.8 RJ2_Conn5.8 RJ2_Conn6.8 RJ2_Conn7.8 RJ2_Conn8.8 USB1.4 | length 2140.5
  Solder Side w19.68: v1(4825,4735) RJ2_Conn1.8@4825,4890 ; v1(5840,5154.72) RJ1_Conn1.8@5840,5245 ; v1(6330,4880) 6340,4890 RJ2_Conn2.8@6425,4890 ; v1(7440,5174.72) RJ1_Conn2.8@7440,5245 ; v1(7940,4890) RJ2_Conn3.8@8025,4890 ; v1(9040,5174.72) RJ1_Conn3.8@9040,5245 ; v1(9530,4885.28) 9534.72,4890 RJ2_Conn4.8@9625,4890 ; v1(10640,5164.72) RJ1_Conn4.8@10640,5245 ; v1(11150,4890) RJ2_Conn5.8@11225,4890 ; v1(12240,5150) RJ1_Conn5.8@12240,5245 ; v1(12730,4890) RJ2_Conn6.8@12825,4890 ; v1(13840,5160) RJ1_Conn6.8@13840,5245 ; v1(14354.72,4890) RJ2_Conn7.8@14425,4890 ; v1(15440,5174.72) RJ1_Conn7.8@15440,5245 ; v1(15934.72,4890) RJ2_Conn8.8@16025,4890 ; v1(17040,5170) RJ1_Conn8.8@17040,5245
  Solder Side w98.43: P1.1@2250,6599 DTVS1.2@2987.46,6599
NetJ1_Conn1_7: J1_Conn1.7 RJ1_Conn1.1 | length 265.6
  Solder Side w25: J1_Conn1.7@5620,5485 5730,5595 RJ1_Conn1.1@5840,5595
NetJ1_Conn1_8: J1_Conn1.8 RJ1_Conn1.2 | length 312.6
  Solder Side w25: J1_Conn1.8@5620,5385 5672.58,5437.58 5672.58,5482.58 5735,5545 RJ1_Conn1.2@5840,5545
NetJ1_Conn1_9: J1_Conn1.9 RJ1_Conn1.3 | length 357
  Solder Side w25: J1_Conn1.9@5620,5285 5707.66,5372.66 5707.66,5457.97 5744.68,5495 RJ1_Conn1.3@5840,5495
NetJ1_Conn1_10: J1_Conn1.10 RJ1_Conn1.6 | length 309.9
  Solder Side w25: J1_Conn1.10@5620,5185 5620,5200 5672.58,5252.58 5672.58,5277.97 5739.61,5345 RJ1_Conn1.6@5840,5345
NetJ1_Conn1_11: J1_Conn1.11 RJ1_Conn1.7 | length 360.2
  Solder Side w25: J1_Conn1.11@5620,5085 5620,5100 5707.66,5187.66 5707.66,5263.44 5739.22,5295 RJ1_Conn1.7@5840,5295
NetJ1_Conn1_40: J1_Conn1.40
NetJ1_Conn1_46: J1_Conn1.46 RJ2_Conn1.1 | length 392.4
  Solder Side w25: RJ2_Conn1.1@5175,4890 5175,4755 5390,4755 J1_Conn1.46@5420,4785
NetJ1_Conn1_47: J1_Conn1.47 RJ2_Conn1.2 | length 488.3
  Solder Side w25: RJ2_Conn1.2@5125,4890 5125,4705 5145,4685 J1_Conn1.47@5420,4685
NetJ1_Conn1_48: J1_Conn1.48 RJ2_Conn1.3 | length 614.9
  Solder Side w25: RJ2_Conn1.3@5075,4890 5075,4645 5135,4585 J1_Conn1.48@5420,4585
NetJ1_Conn1_49: J1_Conn1.49 RJ2_Conn1.6 | length 841.4
  Solder Side w25: RJ2_Conn1.6@4925,4890 4925,4585 5025,4485 J1_Conn1.49@5420,4485
NetJ1_Conn1_50: J1_Conn1.50 RJ2_Conn1.7 | length 962.1
  Solder Side w25: RJ2_Conn1.7@4875,4890 4875,4535 5025,4385 J1_Conn1.50@5420,4385
NetJ1_Conn2_7: J1_Conn2.7 RJ1_Conn2.1 | length 265.6
  Solder Side w25: J1_Conn2.7@7220,5485 7330,5595 RJ1_Conn2.1@7440,5595
NetJ1_Conn2_8: J1_Conn2.8 RJ1_Conn2.2 | length 312.6
  Solder Side w25: J1_Conn2.8@7220,5385 7272.58,5437.58 7272.58,5482.58 7335,5545 RJ1_Conn2.2@7440,5545
NetJ1_Conn2_9: J1_Conn2.9 RJ1_Conn2.3 | length 357
  Solder Side w25: J1_Conn2.9@7220,5285 7307.66,5372.66 7307.66,5457.97 7344.68,5495 RJ1_Conn2.3@7440,5495
NetJ1_Conn2_10: J1_Conn2.10 RJ1_Conn2.6 | length 309.9
  Solder Side w25: J1_Conn2.10@7220,5185 7220,5200 7272.58,5252.58 7272.58,5277.97 7339.61,5345 RJ1_Conn2.6@7440,5345
NetJ1_Conn2_11: J1_Conn2.11 RJ1_Conn2.7 | length 360.2
  Solder Side w25: J1_Conn2.11@7220,5085 7220,5100 7307.66,5187.66 7307.66,5263.44 7339.22,5295 RJ1_Conn2.7@7440,5295
NetJ1_Conn2_39: J1_Conn2.39
NetJ1_Conn2_40: J1_Conn2.40
NetJ1_Conn2_46: J1_Conn2.46 RJ2_Conn2.1 | length 392.4
  Solder Side w25: RJ2_Conn2.1@6775,4890 6775,4755 6990,4755 J1_Conn2.46@7020,4785
NetJ1_Conn2_47: J1_Conn2.47 RJ2_Conn2.2 | length 488.3
  Solder Side w25: RJ2_Conn2.2@6725,4890 6725,4705 6745,4685 J1_Conn2.47@7020,4685
NetJ1_Conn2_48: J1_Conn2.48 RJ2_Conn2.3 | length 614.9
  Solder Side w25: RJ2_Conn2.3@6675,4890 6675,4645 6735,4585 J1_Conn2.48@7020,4585
NetJ1_Conn2_49: J1_Conn2.49 RJ2_Conn2.6 | length 841.4
  Solder Side w25: RJ2_Conn2.6@6525,4890 6525,4585 6625,4485 J1_Conn2.49@7020,4485
NetJ1_Conn2_50: J1_Conn2.50 RJ2_Conn2.7 | length 962.1
  Solder Side w25: RJ2_Conn2.7@6475,4890 6475,4535 6625,4385 J1_Conn2.50@7020,4385
NetJ1_Conn3_7: J1_Conn3.7 RJ1_Conn3.1 | length 265.6
  Solder Side w25: J1_Conn3.7@8820,5485 8930,5595 RJ1_Conn3.1@9040,5595
NetJ1_Conn3_8: J1_Conn3.8 RJ1_Conn3.2 | length 312.6
  Solder Side w25: J1_Conn3.8@8820,5385 8872.58,5437.58 8872.58,5482.58 8935,5545 RJ1_Conn3.2@9040,5545
NetJ1_Conn3_9: J1_Conn3.9 RJ1_Conn3.3 | length 357
  Solder Side w25: J1_Conn3.9@8820,5285 8907.66,5372.66 8907.66,5457.97 8944.68,5495 RJ1_Conn3.3@9040,5495
NetJ1_Conn3_10: J1_Conn3.10 RJ1_Conn3.6 | length 309.9
  Solder Side w25: J1_Conn3.10@8820,5185 8820,5200 8872.58,5252.58 8872.58,5277.97 8939.61,5345 RJ1_Conn3.6@9040,5345
NetJ1_Conn3_11: J1_Conn3.11 RJ1_Conn3.7 | length 360.2
  Solder Side w25: J1_Conn3.11@8820,5085 8820,5100 8907.66,5187.66 8907.66,5263.44 8939.22,5295 RJ1_Conn3.7@9040,5295
NetJ1_Conn3_41: J1_Conn3.41
NetJ1_Conn3_46: J1_Conn3.46 RJ2_Conn3.1 | length 392.4
  Solder Side w25: RJ2_Conn3.1@8375,4890 8375,4755 8590,4755 J1_Conn3.46@8620,4785
NetJ1_Conn3_47: J1_Conn3.47 RJ2_Conn3.2 | length 488.3
  Solder Side w25: RJ2_Conn3.2@8325,4890 8325,4705 8345,4685 J1_Conn3.47@8620,4685
NetJ1_Conn3_48: J1_Conn3.48 RJ2_Conn3.3 | length 614.9
  Solder Side w25: RJ2_Conn3.3@8275,4890 8275,4645 8335,4585 J1_Conn3.48@8620,4585
NetJ1_Conn3_49: J1_Conn3.49 RJ2_Conn3.6 | length 841.4
  Solder Side w25: RJ2_Conn3.6@8125,4890 8125,4585 8225,4485 J1_Conn3.49@8620,4485
NetJ1_Conn3_50: J1_Conn3.50 RJ2_Conn3.7 | length 962.1
  Solder Side w25: RJ2_Conn3.7@8075,4890 8075,4535 8225,4385 J1_Conn3.50@8620,4385
NetJ1_Conn4_7: J1_Conn4.7 RJ1_Conn4.1 | length 265.6
  Solder Side w25: J1_Conn4.7@10420,5485 10530,5595 RJ1_Conn4.1@10640,5595
NetJ1_Conn4_8: J1_Conn4.8 RJ1_Conn4.2 | length 312.6
  Solder Side w25: J1_Conn4.8@10420,5385 10472.58,5437.58 10472.58,5482.58 10535,5545 RJ1_Conn4.2@10640,5545
NetJ1_Conn4_9: J1_Conn4.9 RJ1_Conn4.3 | length 357
  Solder Side w25: J1_Conn4.9@10420,5285 10507.66,5372.66 10507.66,5457.97 10544.68,5495 RJ1_Conn4.3@10640,5495
NetJ1_Conn4_10: J1_Conn4.10 RJ1_Conn4.6 | length 309.9
  Solder Side w25: J1_Conn4.10@10420,5185 10420,5200 10472.58,5252.58 10472.58,5277.97 10539.61,5345 RJ1_Conn4.6@10640,5345
NetJ1_Conn4_11: J1_Conn4.11 RJ1_Conn4.7 | length 360.2
  Solder Side w25: J1_Conn4.11@10420,5085 10420,5100 10507.66,5187.66 10507.66,5263.44 10539.22,5295 RJ1_Conn4.7@10640,5295
NetJ1_Conn4_39: J1_Conn4.39
NetJ1_Conn4_41: J1_Conn4.41
NetJ1_Conn4_46: J1_Conn4.46 RJ2_Conn4.1 | length 392.4
  Solder Side w25: RJ2_Conn4.1@9975,4890 9975,4755 10190,4755 J1_Conn4.46@10220,4785
NetJ1_Conn4_47: J1_Conn4.47 RJ2_Conn4.2 | length 488.3
  Solder Side w25: RJ2_Conn4.2@9925,4890 9925,4705 9945,4685 J1_Conn4.47@10220,4685
NetJ1_Conn4_48: J1_Conn4.48 RJ2_Conn4.3 | length 614.9
  Solder Side w25: RJ2_Conn4.3@9875,4890 9875,4645 9935,4585 J1_Conn4.48@10220,4585
NetJ1_Conn4_49: J1_Conn4.49 RJ2_Conn4.6 | length 841.4
  Solder Side w25: RJ2_Conn4.6@9725,4890 9725,4585 9825,4485 J1_Conn4.49@10220,4485
NetJ1_Conn4_50: J1_Conn4.50 RJ2_Conn4.7 | length 962.1
  Solder Side w25: RJ2_Conn4.7@9675,4890 9675,4535 9825,4385 J1_Conn4.50@10220,4385
NetJ1_Conn5_7: J1_Conn5.7 RJ1_Conn5.1 | length 265.6
  Solder Side w25: J1_Conn5.7@12020,5485 12130,5595 RJ1_Conn5.1@12240,5595
NetJ1_Conn5_8: J1_Conn5.8 RJ1_Conn5.2 | length 312.6
  Solder Side w25: J1_Conn5.8@12020,5385 12072.58,5437.58 12072.58,5482.58 12135,5545 RJ1_Conn5.2@12240,5545
NetJ1_Conn5_9: J1_Conn5.9 RJ1_Conn5.3 | length 357
  Solder Side w25: J1_Conn5.9@12020,5285 12107.66,5372.66 12107.66,5457.97 12144.68,5495 RJ1_Conn5.3@12240,5495
NetJ1_Conn5_10: J1_Conn5.10 RJ1_Conn5.6 | length 309.9
  Solder Side w25: J1_Conn5.10@12020,5185 12020,5200 12072.58,5252.58 12072.58,5277.97 12139.61,5345 RJ1_Conn5.6@12240,5345
NetJ1_Conn5_11: J1_Conn5.11 RJ1_Conn5.7 | length 360.2
  Solder Side w25: J1_Conn5.11@12020,5085 12020,5100 12107.66,5187.66 12107.66,5263.44 12139.22,5295 RJ1_Conn5.7@12240,5295
NetJ1_Conn5_40: J1_Conn5.40
NetJ1_Conn5_41: J1_Conn5.41
NetJ1_Conn5_46: J1_Conn5.46 RJ2_Conn5.1 | length 392.4
  Solder Side w25: RJ2_Conn5.1@11575,4890 11575,4755 11790,4755 J1_Conn5.46@11820,4785
NetJ1_Conn5_47: J1_Conn5.47 RJ2_Conn5.2 | length 488.3
  Solder Side w25: RJ2_Conn5.2@11525,4890 11525,4705 11545,4685 J1_Conn5.47@11820,4685
NetJ1_Conn5_48: J1_Conn5.48 RJ2_Conn5.3 | length 614.9
  Solder Side w25: RJ2_Conn5.3@11475,4890 11475,4645 11535,4585 J1_Conn5.48@11820,4585
NetJ1_Conn5_49: J1_Conn5.49 RJ2_Conn5.6 | length 841.4
  Solder Side w25: RJ2_Conn5.6@11325,4890 11325,4585 11425,4485 J1_Conn5.49@11820,4485
NetJ1_Conn5_50: J1_Conn5.50 RJ2_Conn5.7 | length 962.1
  Solder Side w25: RJ2_Conn5.7@11275,4890 11275,4535 11425,4385 J1_Conn5.50@11820,4385
NetJ1_Conn6_7: J1_Conn6.7 RJ1_Conn6.1 | length 265.6
  Solder Side w25: J1_Conn6.7@13620,5485 13730,5595 RJ1_Conn6.1@13840,5595
NetJ1_Conn6_8: J1_Conn6.8 RJ1_Conn6.2 | length 312.6
  Solder Side w25: J1_Conn6.8@13620,5385 13672.58,5437.58 13672.58,5482.58 13735,5545 RJ1_Conn6.2@13840,5545
NetJ1_Conn6_9: J1_Conn6.9 RJ1_Conn6.3 | length 357
  Solder Side w25: J1_Conn6.9@13620,5285 13707.66,5372.66 13707.66,5457.97 13744.68,5495 RJ1_Conn6.3@13840,5495
NetJ1_Conn6_10: J1_Conn6.10 RJ1_Conn6.6 | length 309.9
  Solder Side w25: J1_Conn6.10@13620,5185 13620,5200 13672.58,5252.58 13672.58,5277.97 13739.61,5345 RJ1_Conn6.6@13840,5345
NetJ1_Conn6_11: J1_Conn6.11 RJ1_Conn6.7 | length 360.2
  Solder Side w25: J1_Conn6.11@13620,5085 13620,5100 13707.66,5187.66 13707.66,5263.44 13739.22,5295 RJ1_Conn6.7@13840,5295
NetJ1_Conn6_39: J1_Conn6.39
NetJ1_Conn6_40: J1_Conn6.40
NetJ1_Conn6_41: J1_Conn6.41
NetJ1_Conn6_46: J1_Conn6.46 RJ2_Conn6.1 | length 392.4
  Solder Side w25: RJ2_Conn6.1@13175,4890 13175,4755 13390,4755 J1_Conn6.46@13420,4785
NetJ1_Conn6_47: J1_Conn6.47 RJ2_Conn6.2 | length 488.3
  Solder Side w25: RJ2_Conn6.2@13125,4890 13125,4705 13145,4685 J1_Conn6.47@13420,4685
NetJ1_Conn6_48: J1_Conn6.48 RJ2_Conn6.3 | length 614.9
  Solder Side w25: RJ2_Conn6.3@13075,4890 13075,4645 13135,4585 J1_Conn6.48@13420,4585
NetJ1_Conn6_49: J1_Conn6.49 RJ2_Conn6.6 | length 841.4
  Solder Side w25: RJ2_Conn6.6@12925,4890 12925,4585 13025,4485 J1_Conn6.49@13420,4485
NetJ1_Conn6_50: J1_Conn6.50 RJ2_Conn6.7 | length 962.1
  Solder Side w25: RJ2_Conn6.7@12875,4890 12875,4535 13025,4385 J1_Conn6.50@13420,4385
NetJ1_Conn7_7: J1_Conn7.7 RJ1_Conn7.1 | length 265.6
  Solder Side w25: J1_Conn7.7@15220,5485 15330,5595 RJ1_Conn7.1@15440,5595
NetJ1_Conn7_8: J1_Conn7.8 RJ1_Conn7.2 | length 312.6
  Solder Side w25: J1_Conn7.8@15220,5385 15272.58,5437.58 15272.58,5482.58 15335,5545 RJ1_Conn7.2@15440,5545
NetJ1_Conn7_9: J1_Conn7.9 RJ1_Conn7.3 | length 357
  Solder Side w25: J1_Conn7.9@15220,5285 15307.66,5372.66 15307.66,5457.97 15344.68,5495 RJ1_Conn7.3@15440,5495
NetJ1_Conn7_10: J1_Conn7.10 RJ1_Conn7.6 | length 309.9
  Solder Side w25: J1_Conn7.10@15220,5185 15220,5200 15272.58,5252.58 15272.58,5277.97 15339.61,5345 RJ1_Conn7.6@15440,5345
NetJ1_Conn7_11: J1_Conn7.11 RJ1_Conn7.7 | length 360.2
  Solder Side w25: J1_Conn7.11@15220,5085 15220,5100 15307.66,5187.66 15307.66,5263.44 15339.22,5295 RJ1_Conn7.7@15440,5295
NetJ1_Conn7_42: J1_Conn7.42
NetJ1_Conn7_46: J1_Conn7.46 RJ2_Conn7.1 | length 392.4
  Solder Side w25: RJ2_Conn7.1@14775,4890 14775,4755 14990,4755 J1_Conn7.46@15020,4785
NetJ1_Conn7_47: J1_Conn7.47 RJ2_Conn7.2 | length 488.3
  Solder Side w25: RJ2_Conn7.2@14725,4890 14725,4705 14745,4685 J1_Conn7.47@15020,4685
NetJ1_Conn7_48: J1_Conn7.48 RJ2_Conn7.3 | length 614.9
  Solder Side w25: RJ2_Conn7.3@14675,4890 14675,4645 14735,4585 J1_Conn7.48@15020,4585
NetJ1_Conn7_49: J1_Conn7.49 RJ2_Conn7.6 | length 841.4
  Solder Side w25: RJ2_Conn7.6@14525,4890 14525,4585 14625,4485 J1_Conn7.49@15020,4485
NetJ1_Conn7_50: J1_Conn7.50 RJ2_Conn7.7 | length 962.1
  Solder Side w25: RJ2_Conn7.7@14475,4890 14475,4535 14625,4385 J1_Conn7.50@15020,4385
NetJ1_Conn8_7: J1_Conn8.7 RJ1_Conn8.1 | length 265.6
  Solder Side w25: J1_Conn8.7@16820,5485 16930,5595 RJ1_Conn8.1@17040,5595
NetJ1_Conn8_8: J1_Conn8.8 RJ1_Conn8.2 | length 312.6
  Solder Side w25: J1_Conn8.8@16820,5385 16872.58,5437.58 16872.58,5482.58 16935,5545 RJ1_Conn8.2@17040,5545
NetJ1_Conn8_9: J1_Conn8.9 RJ1_Conn8.3 | length 357
  Solder Side w25: J1_Conn8.9@16820,5285 16907.66,5372.66 16907.66,5457.97 16944.68,5495 RJ1_Conn8.3@17040,5495
NetJ1_Conn8_10: J1_Conn8.10 RJ1_Conn8.6 | length 309.9
  Solder Side w25: J1_Conn8.10@16820,5185 16820,5200 16872.58,5252.58 16872.58,5277.97 16939.61,5345 RJ1_Conn8.6@17040,5345
NetJ1_Conn8_11: J1_Conn8.11 RJ1_Conn8.7 | length 360.2
  Solder Side w25: J1_Conn8.11@16820,5085 16820,5100 16907.66,5187.66 16907.66,5263.44 16939.22,5295 RJ1_Conn8.7@17040,5295
NetJ1_Conn8_39: J1_Conn8.39
NetJ1_Conn8_42: J1_Conn8.42
NetJ1_Conn8_46: J1_Conn8.46 RJ2_Conn8.1 | length 392.4
  Solder Side w25: RJ2_Conn8.1@16375,4890 16375,4755 16590,4755 J1_Conn8.46@16620,4785
NetJ1_Conn8_47: J1_Conn8.47 RJ2_Conn8.2 | length 488.3
  Solder Side w25: RJ2_Conn8.2@16325,4890 16325,4705 16345,4685 J1_Conn8.47@16620,4685
NetJ1_Conn8_48: J1_Conn8.48 RJ2_Conn8.3 | length 614.9
  Solder Side w25: RJ2_Conn8.3@16275,4890 16275,4645 16335,4585 J1_Conn8.48@16620,4585
NetJ1_Conn8_49: J1_Conn8.49 RJ2_Conn8.6 | length 841.4
  Solder Side w25: RJ2_Conn8.6@16125,4890 16125,4585 16225,4485 J1_Conn8.49@16620,4485
NetJ1_Conn8_50: J1_Conn8.50 RJ2_Conn8.7 | length 962.1
  Solder Side w25: RJ2_Conn8.7@16075,4890 16075,4535 16225,4385 J1_Conn8.50@16620,4385
NetJ2_39: J2.39 USB1.1 | length 265
  Component Side w50: USB1.1@2996.38,5409.21 3059.21,5409.21 3135,5485 J2.39@3230,5485
NetJ2_40: J2.40 USB1.2 | length 264.4
  Component Side w20: USB1.2@2996.38,5310.79 3060.79,5310.79 3135,5385 J2.40@3230,5385
NetJ2_41: J2.41 USB1.3 | length 399.7
  Component Side w20: USB1.3@2870,5310.79 2930.79,5250 3140,5250 3175,5285 J2.41@3230,5285
RXA1: J1_Conn1.17 J2.30 | length 2728.5
  Signal Layer 1 w19.68: J2.30@3430,3185 3992.91,3185 5172.59,4364.68 5284.68,4364.68 5355.08,4435.08 5440.68,4435.08 5490.6,4485 J1_Conn1.17@5620,4485
RXA2: J1_Conn2.17 J2.28 | length 6828.6
  Signal Layer 1 w19.68: J2.28@3439.8,3390 3439.92,3390 3509.68,3459.76 3509.68,3609.9 5070,5170.22 5070,6120 5273.31,6323.31 5686.69,6323.31 6300,5710 6300,4980 6745.08,4534.92 7040.68,4534.92 7090.6,4485 J1_Conn2.17@7220,4485
RXA3: J1_Conn3.17 J2.25 | length 8245.6
  Signal Layer 1 w19.68: J2.25@3430,3685 3458.01,3685 4980,5206.99 4980,6160 5232.6,6412.6 7207.4,6412.6 8240,5380 8240,4750 8455.08,4534.92 8640.68,4534.92 8690.6,4485 J1_Conn3.17@8820,4485
RXA4: J1_Conn4.17 J2.22 | length 9947.6
  Signal Layer 1 w19.68: J2.22@3430,3985 3631.74,3985 4890.71,5243.97 4890.71,6204.89 5187.71,6501.89 9050.2,6501.89 9919.76,5632.33 9919.76,4750.24 10135.08,4534.92 10240.68,4534.92 10290.6,4485 J1_Conn4.17@10420,4485
RXA5: J1_Conn5.17 J2.19 | length 11791.5
  Signal Layer 1 w19.68: J2.19@3430,4285 3763.37,4285 4770.47,5292.1 4770.47,6253.03 5138.39,6620.95 10891.15,6620.95 11319.76,6192.33 11319.76,4850 11634.68,4535.08 11969.92,4535.08 J1_Conn5.17@12020,4485
RXA6: J1_Conn6.17 J2.16 | length 13550.3
  Signal Layer 1 w19.68: J2.16@3430,4585 3498.72,4516.28 3826.28,4516.28 4651.42,5341.42 4651.42,6302.34 5089.08,6740 12462.09,6740 13029.76,6172.33 13029.76,4612.33 13107.17,4534.92 13440.68,4534.92 13490.6,4485 J1_Conn6.17@13620,4485
RXA7: J1_Conn7.17 J2.13 | length 14835.2
  Signal Layer 2 w19.68: J2.13@3430,4885 3619.21,4885 3780,4724.21 4421.66,4724.21 4891.42,5193.97 4891.42,6243.97 5148.86,6501.42 14210.67,6501.42 14709.76,6002.33 14709.76,4650 14824.84,4534.92 15040.68,4534.92 15090.6,4485 J1_Conn7.17@15220,4485
RXA8: J1_Conn8.17 J2.10 | length 16500
  Signal Layer 2 w19.68: J2.10@3430,5185 3491.28,5185 3833.01,4843.27 4372.35,4843.27 4772.36,5243.28 4772.36,6293.28 5099.55,6620.47 15575.34,6620.47 16120,6075.82 16120,4825 16410.08,4534.92 16640.68,4534.92 16645.6,4530 16775,4530 J1_Conn8.17@16820,4485
RXB1: J1_Conn1.44 J2.62 | length 2924.5
  Signal Layer 1 w19.68: J2.62@3230,3185 3380.08,3335.08 3450.68,3335.08 3455.6,3340 3732.91,3340 5370.08,4977.17 J1_Conn1.44@5412.17,4977.17
RXB2: J1_Conn2.44 J2.59 | length 6283.8
  Signal Layer 1 w19.68: J2.59@3230,3485 3255,3485 3405.08,3635.08 3450.68,3635.08 5010.47,5194.87 5010.47,6144.66 5248.65,6382.84 5717.16,6382.84 6965.08,5134.92 7055.08,5134.92 7080,5110 7080,5045 J1_Conn2.44@7020,4985
RXB3: J1_Conn3.44 J2.56 | length 7712.9
  Signal Layer 1 w19.68: J2.56@3230,3785 3359.4,3785 3409.32,3834.92 3565.84,3834.92 4950.24,5219.31 4950.24,6180.24 5212.36,6442.36 7257.64,6442.36 8565,5135 8565,5040 J1_Conn3.44@8620,4985
RXB4: J1_Conn4.44 J2.53 | length 9610.3
  Signal Layer 1 w19.68: J2.53@3230,4085 3359.4,4085 3409.32,4134.92 3450.68,4134.92 3465.6,4120 3682.55,4120 4830,5267.45 4830,6228.37 5163.05,6561.42 9074.86,6561.42 9980,5656.28 9980,5325 10170.08,5134.92 10265.08,5134.92 10290,5110 10290,5055 J1_Conn4.44@10220,4985
RXB5: J1_Conn5.44 J2.50 | length 11303.5
  Signal Layer 1 w19.68: J2.50@3230,4385 3359.4,4385 3409.32,4434.92 3450.68,4434.92 3466.41,4419.18 3813.37,4419.18 4710.95,5316.76 4710.95,6277.68 5113.73,6680.47 10915.8,6680.47 11379.29,6216.99 11379.29,5390 11784.29,4985 J1_Conn5.44@11820,4985
RXB6: J1_Conn6.44 J2.47 | length 12698.2
  Signal Layer 2 w19.68: J2.47@3230,4685 3359.4,4685 3409.32,4734.92 3669.76,4734.92 3740,4664.68 4446.32,4664.68 4950.95,5169.31 4950.95,6219.31 5173.52,6441.89 12760.2,6441.89 13029.76,6172.33 13029.76,5312.33 13357.09,4985 J1_Conn6.44@13420,4985
RXB7: J1_Conn7.44 J2.44 | length 14498.9
  Signal Layer 2 w19.68: J2.44@3230,4985 3359.4,4985 3409.32,5034.92 3557.17,5034.92 3808.35,4783.74 4397,4783.74 4831.89,5218.63 4831.89,6268.63 5124.21,6560.95 14235.33,6560.95 14769.29,6026.99 14769.29,5277.8 14912.17,5134.92 15040.68,5134.92 15069.92,5105.68 15069.92,5034.92 J1_Conn7.44@15020,4985
RXB8: J1_Conn8.44 J2.7 | length 15491.3
  Signal Layer 2 w19.68: J2.7@3430,5485 3565,5350 4570,5350 4710.95,5490.95 4710.95,6316.05 5074.89,6680 15600,6680 16179.53,6100.47 16179.53,5810.47 16180,5810 16180,5525 16569.92,5135.08 16664.92,5135.08 16690,5110 16690,5055 J1_Conn8.44@16620,4985
SCLNET: J1_Conn1.4 J1_Conn1.36 J1_Conn2.4 J1_Conn2.36 J1_Conn3.4 J1_Conn3.36 J1_Conn4.4 J1_Conn4.36 J1_Conn5.4 J1_Conn5.36 J1_Conn6.4 J1_Conn6.36 J1_Conn7.4 J1_Conn7.36 J1_Conn8.4 J1_Conn8.36 J2.4 J2.36 | length 27180
  Component Side w50: J2.36@3230,5785 J2.4@3430,5785 J1_Conn1.36@5420,5785 J1_Conn1.4@5620,5785 J1_Conn2.36@7020,5785 J1_Conn2.4@7220,5785 J1_Conn3.36@8620,5785 J1_Conn3.4@8820,5785 J1_Conn4.36@10220,5785 J1_Conn4.4@10420,5785 J1_Conn5.36@11820,5785 J1_Conn5.4@12020,5785 J1_Conn6.36@13420,5785 J1_Conn6.4@13620,5785 J1_Conn7.36@15020,5785 J1_Conn7.4@15220,5785 J1_Conn8.36@16620,5785 J1_Conn8.4@16820,5785
  Solder Side w50: J2.36@3230,5785 J2.4@3430,5785 J1_Conn1.36@5420,5785 J1_Conn1.4@5620,5785 J1_Conn2.36@7020,5785 J1_Conn2.4@7220,5785 J1_Conn3.36@8620,5785 J1_Conn3.4@8820,5785 J1_Conn4.36@10220,5785 J1_Conn4.4@10420,5785 J1_Conn5.36@11820,5785 J1_Conn5.4@12020,5785 J1_Conn6.36@13420,5785 J1_Conn6.4@13620,5785 J1_Conn7.36@15020,5785 J1_Conn7.4@15220,5785 J1_Conn8.36@16620,5785 J1_Conn8.4@16820,5785